# Altium PCB PCB1.PcbDoc
Units mm, origin at the board's own origin, x right, y up, seen from the top; angles counter-clockwise.
Board outline 96.77 x 92.46 mm, 2 copper layers (Top Layer, Bottom Layer); 31 components, 25 nets, 127 pads, 0 vias.
Unrouted connection lines stored in the file: 1.
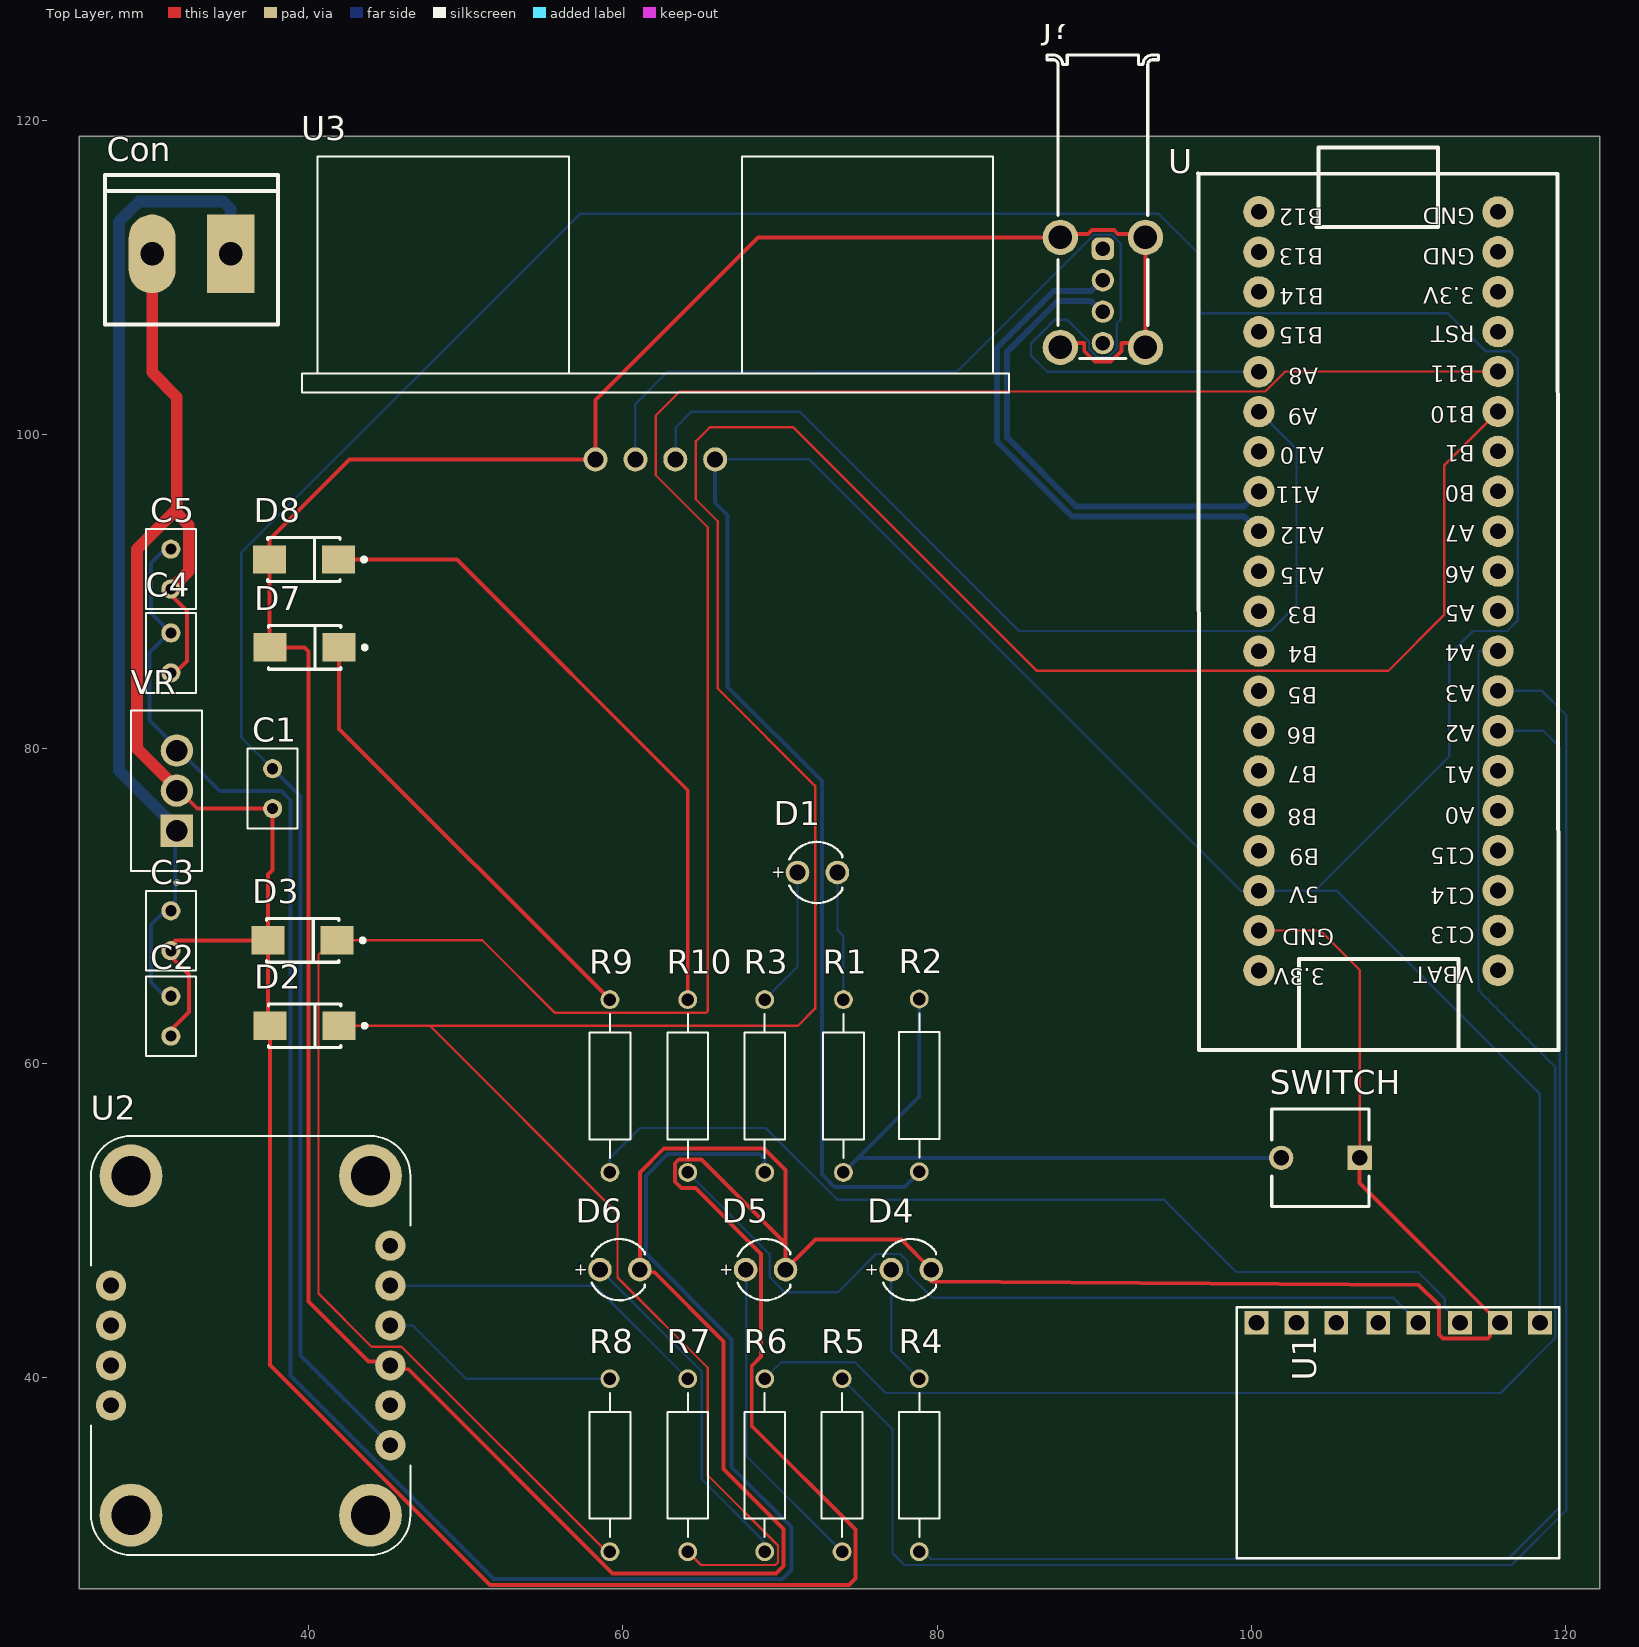
[diagram p0: Top Layer view]
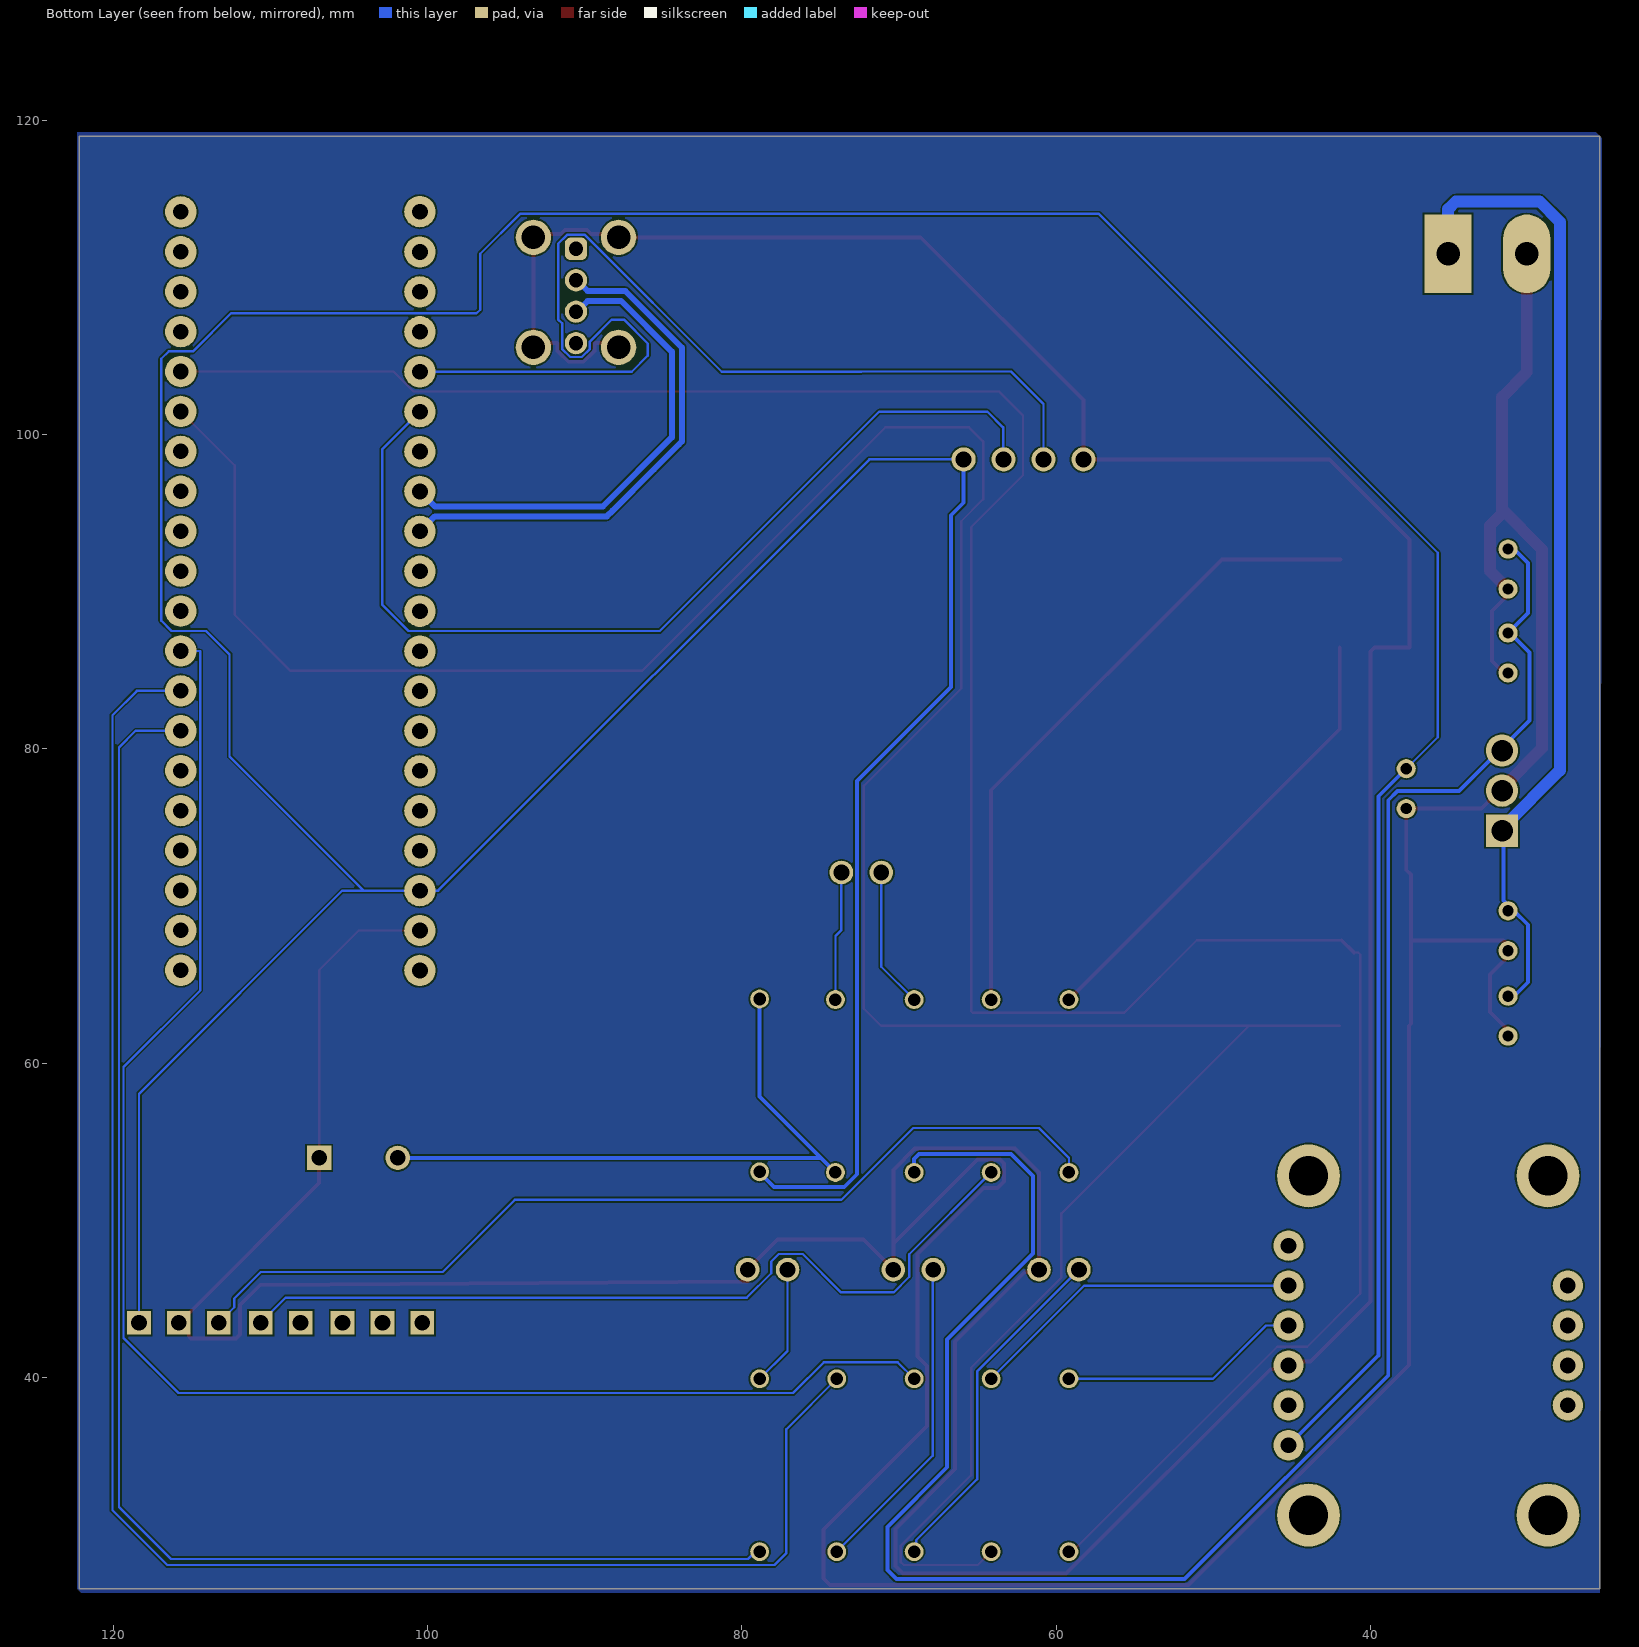
[diagram p1: Bottom Layer view, seen from below]
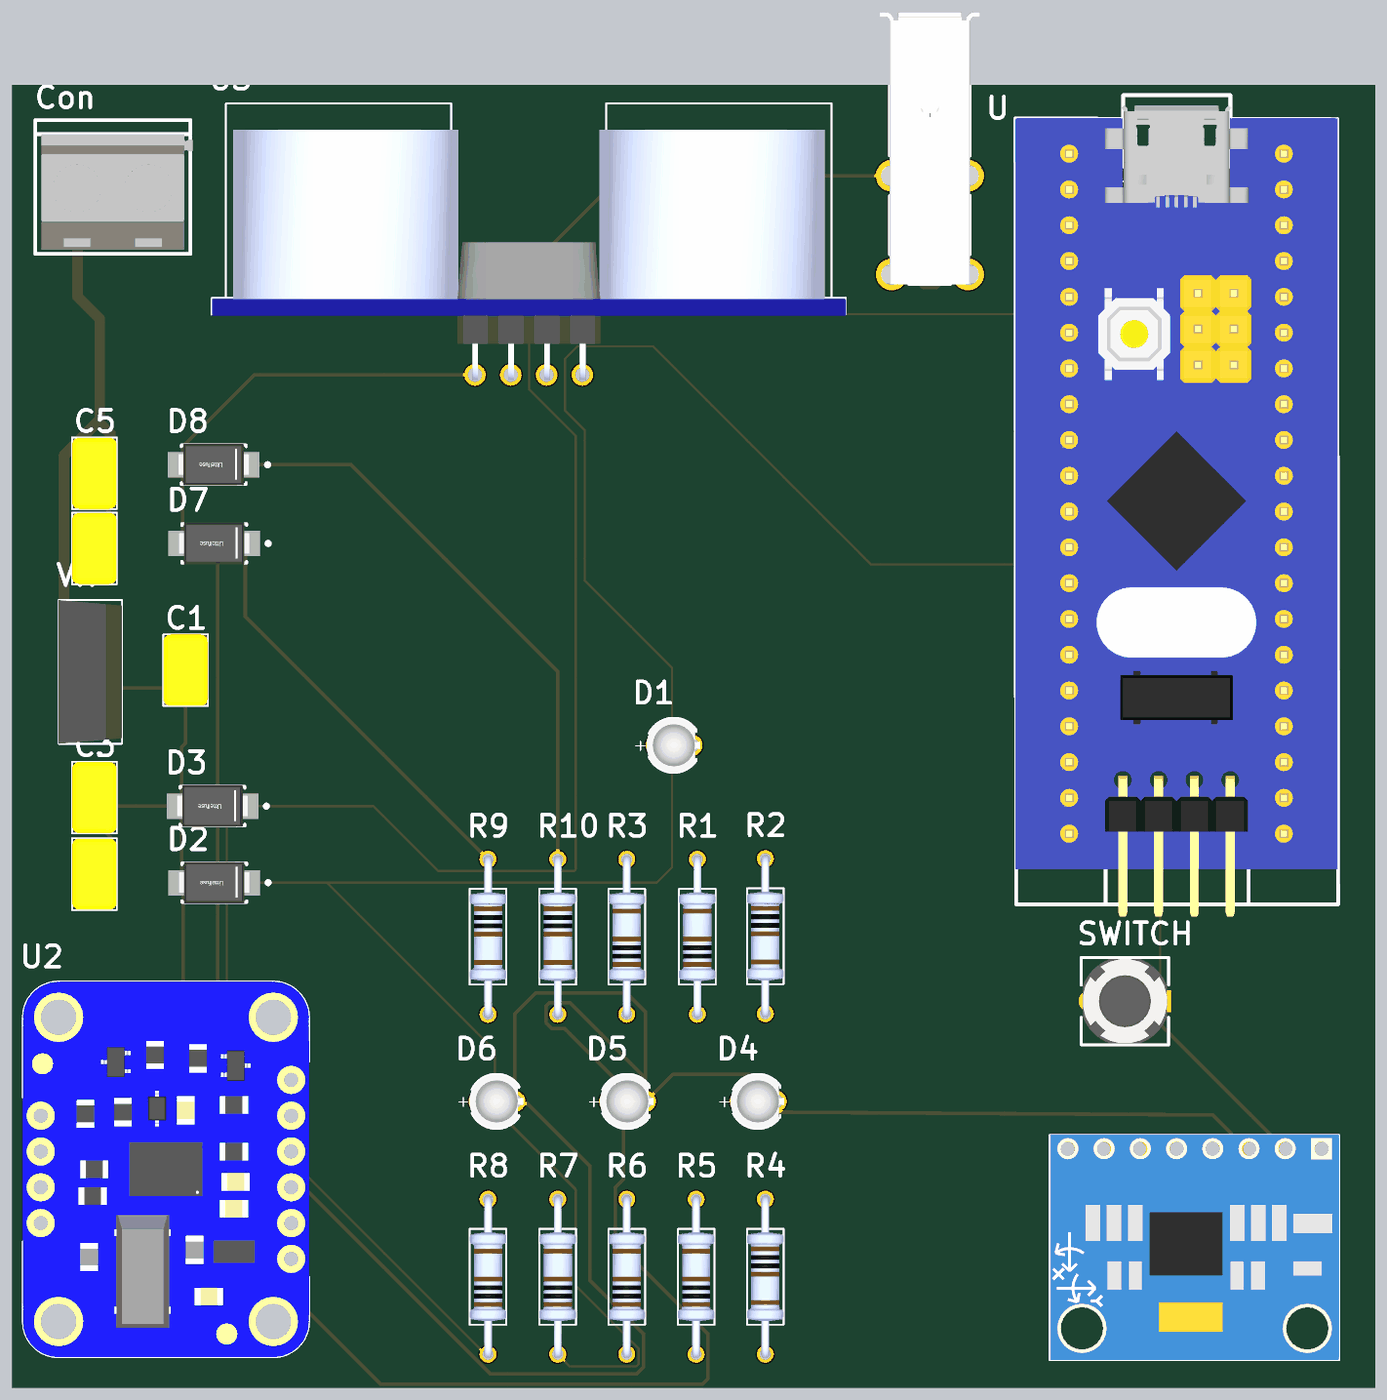
[diagram p2: 3D render of the assembled board from above, using the file's embedded part models]

## Layer stack, top to bottom
Top Solder: solder mask 0.0102, Solder Resist, Dk 3.5
Top Layer: signal copper 0.0356
Dielectric 1: dielectric 0.32, FR-4, Dk 4.8
Bottom Layer: signal copper 0.0356
Bottom Solder: solder mask 0.0102, Solder Resist, Dk 3.5

## Board outline
25.4,26.543 122.174,26.543 122.174,118.999 25.4,118.999

## Design rules (kind name [scope] priority, off if disabled: settings)
Clearance [All] p1: gap=0.1 ignorepadtopadclearanceinfootprint=FALSE
DiffPairsRouting DiffPairsRouting_1 [InDifferentialPair ('USB_2.0')] p1: maxlimit=0.254 minlimit=0.254 mostfreqgap=0.254 toplayer_minwidth=0.381 toplayer_maxwidth=0.381 toplayer_prefwidth=0.381 bottomlayer_minwidth=0.381 bottomlayer_maxwidth=0.381 bottomlayer_prefwidth=0.381 maxuncoupledlength=12.7
DiffPairsRouting [All] p2: maxlimit=0.254 minlimit=0.2 mostfreqgap=0.25 toplayer_minwidth=0.2 toplayer_maxwidth=0.35 toplayer_prefwidth=0.2 bottomlayer_minwidth=0.2 bottomlayer_maxwidth=0.35 bottomlayer_prefwidth=0.2 maxuncoupledlength=12.7
MatchedLengths [InDifferentialPair ('USB_2.0')] p1: tolerance=25.4 checknetsindiffpair=FALSE checkdiffpairvsdiffpair=TRUE checkxsignals=TRUE checkothers=TRUE
PolygonConnect [All] p1: connectstyle=Relief reliefconductorwidth=0.254 reliefentries=4 polygonreliefangle="90 Angle" airgapwidth=0.254
RoutingLayers [All] p1: top layer_v5=TRUE bottom layer_v5=FALSE
RoutingVias [All] p1: holewidth=0.711 width=1.27 viastyle="Through Hole" minholewidth=0.711 minwidth=1.27 maxholewidth=0.711 maxwidth=1.27
SolderMaskExpansion [All] p1: expansion=0.102 istentingtop=FALSE
SupplyNets "Schematic Supply Nets_2" [InNet('+12')] p1: voltage=0.000
SupplyNets "Schematic Supply Nets_1" [InNet('GND')] p2: voltage=0.000
UnRoutedNet [All] p1: checkbadconnections=TRUE
Width [All] p1: maxlimit=0.75 minlimit=0.15 preferedwidth=0.15
27 further rules are at their usual default settings.

## Classes and differential pairs
differential pair USB_2.0: +USB-D+ -USB-D-

## Components (designator, comment, footprint, x,y, rotation, side; value= is the part's Value field where it differs from the comment)
C1 "1uF" CAPRR254W50L508T317H508 37.719,77.47 r90 top
C2 "1uF" CAPRR254W50L508T317H508 31.242,62.992 r90 top
C3 "100nF" CAPRR254W50L508T317H508 31.242,68.427 r90 top
C4 "100nF" CAPRR254W50L508T317H508 31.242,86.106 r90 top
C5 "1uF" CAPRR254W50L508T317H508 31.242,91.44 r90 top
Con "Terminal" "Terminal Block 2 Pin" 34.552,99.006 r0 top
D1 "Blue, 2.8V, 30°" WL-TMRW_D3.9H10.5 72.39,72.136 r0 top
D2 "SMAJ6.0A" FP-SMAJ-MFG 39.751,62.383 r180 top
D3 "SMAJ6.0A" FP-SMAJ-MFG 39.624,67.818 r180 top
D4 "Blue, 2.8V, 30°" WL-TMRW_D3.9H10.5 78.359,46.863 r0 top
D5 "Blue, 2.8V, 30°" WL-TMRW_D3.9H10.5 69.088,46.863 r0 top
D6 "Blue, 2.8V, 30°" WL-TMRW_D3.9H10.5 59.817,46.863 r0 top
D7 "SMAJ6.0A" FP-SMAJ-MFG 39.751,86.461 r180 top
D8 "SMAJ6.0A" FP-SMAJ-MFG 39.71,92.049 r180 top
J? "614004134726" 614004134726 90.551,114.503 r180 top
R1 "1K" RESAD1100W55L680D260 74.041,58.547 r90 top
R2 "1K" RESAD1100W55L680D260 78.867,58.586 r270 top
R3 "330" RESAD1100W55L680D260 69.032,58.547 r90 top
R4 "1K" RESAD1100W55L680D260 78.867,34.417 r270 top
R5 "1K" RESAD1100W55L680D260 73.956,34.417 r90 top
R6 "1K" RESAD1100W55L680D260 69.032,34.417 r90 top
R7 "1K" RESAD1100W55L680D260 64.135,34.417 r90 top
R8 "1K" RESAD1100W55L680D260 59.182,34.417 r90 top
R9 "1K" RESAD1100W55L680D260 59.182,58.547 r270 top
R10 "1K" RESAD1100W55L680D260 64.135,58.547 r270 top
SWITCH "EVQ-11L07K" FP-EVQ-11L07K-MFG 104.394,53.975 r180 top
U "STM32F103C8T6" "Stm32 BluePill" 108.311,84.279 r180 top
U1 "MPU-6050" SEN0142 108.583,42.219 r180 top
U2 "2472" MODULE_2472 36.322,42.037 r90 top
U3 "HC-SR04" XCVR_HC-SR04 62.072,98.425 r180 top
VR "L7805" TO255P1020X450X2000-3 30.961,77.343 r90 top

## Footprints (in the part's own frame and the unit in brackets; to place one, negate y for a bottom-side part, rotate by r counter-clockwise, add the part's x,y. Pads: shape width x height; smd on the part's side, far side on the other; paste and mask are expansions set on the pad)
614004134726 [mm] "USB 2.0 Type A Up Right"
  rrect50% 1.42x1.42 hole 0.92: 1(0,2.68)
  round 1.42 hole 0.92: 2(0,4.68) 3(0,6.68) 4(0,8.68)
  round 2.25 hole 1.5: Shell(-2.71,8.95) Shell(-2.71,1.95) Shell(2.71,8.95) Shell(2.71,1.95)
  silkscreen extent -3.55,-9.65 3.55,9.65, body extent -3.55,-9.65 3.55,9.65, height 14.49
CAPRR254W50L508T317H508 [mm]
  round 1.218 hole 0.71: 1(-1.27,0) 2(1.27,0)
  silkscreen extent -2.54,-1.59 2.54,1.59, body extent -2.54,-1.59 2.54,1.59, height 5.08
FP-EVQ-11L07K-MFG [mm]
  rect 1.55x1.55 hole 1 paste-2539.97 mask+0: A(-2.5,0)
  round 1.55 hole 1 paste-2539.97 mask+0: B(2.5,0)
  silkscreen extent -3.1,-3.1 3.1,3.1, body extent -3.37,-3.2 3.37,3.2, height 0.25
FP-SMAJ-MFG [mm]
  rect 2.1x1.8 smd paste+0 mask+0: 1(-2.2,0) 2(2.2,0)
  silkscreen extent -3.95,-1.39 2.3,1.4, body extent -3.35,-1.5 3.35,1.5, height 0.25
MODULE_2472 [mm]
  round 1.93 hole 1: 1(-6.35,-8.89) 2(-3.81,-8.89) 3(-1.27,-8.89) 4(1.27,-8.89) 5(3.81,-8.89) 6(6.35,-8.89) 7(3.81,8.89) 8(1.27,8.89) 9(-1.27,8.89) 10(-3.81,8.89)
  round 4 hole 2.5: SH1(-10.795,-7.62) SH2(10.795,-7.62) SH3(10.795,7.62) SH4(-10.795,7.62)
  silkscreen extent -13.33,-10.16 13.33,10.16, body extent -13.33,-10.16 13.33,10.16, height 4.23
RESAD1100W55L680D260 [mm]
  round 1.2 hole 0.8: 1(-5.5,0) 2(5.5,0)
  silkscreen extent -4.58,-1.3 4.58,1.3, body extent -5.77,-1.3 5.77,1.3, height 2.6
SEN0142 [mm]
  rect 1.508x1.508 / inner round 1.508 / far side rect 1.508x1.508 hole 1: 1(-9.779,-1.27) 2(-7.239,-1.27) 3(-4.699,-1.27) 4(-2.032,-1.27) 5(0.508,-1.27) 6(3.175,-1.27) 7(5.715,-1.27) 8(8.255,-1.27)
  silkscreen extent -11,-2.25 9.53,13.72, body extent -11.01,-2.29 9.49,13.71, height 2.5
"Stm32 BluePill" [mm]
  round 2 hole 1: 1(7.828,-29.908) 2(7.828,-27.343) 3(7.828,-24.803) 4(7.828,-22.263) 5(7.828,-19.723) 6(7.828,-17.183) 7(7.828,-14.643) 8(7.828,-12.103) 9(7.828,-9.563) 10(7.828,-7.023) 11(7.828,-4.483) 12(7.828,-1.943) 13(7.828,0.597) 14(7.828,3.137) 15(7.828,5.677) 16(7.828,8.217) 17(7.828,10.757) 18(7.828,13.297) 19(7.828,15.837) 20(7.828,18.377) 21(-7.386,18.366) 22(-7.386,15.826) 23(-7.386,13.286) 24(-7.386,10.746) 25(-7.386,8.206) 26(-7.386,5.666) 27(-7.386,3.126) 28(-7.386,0.586) 29(-7.386,-1.954) 30(-7.386,-4.494) 31(-7.386,-7.034) 32(-7.386,-9.574) 33(-7.386,-12.114) 34(-7.386,-14.654) 35(-7.386,-17.194) 36(-7.386,-19.734) 37(-7.386,-22.274) 38(-7.386,-24.814) 39(-7.386,-27.354) 40(-7.386,-29.894)
  silkscreen extent -11.22,-34 11.69,23.43, body extent -11.18,-33.27 11.68,24.29, height 12.31
"Terminal Block 2 Pin" [mm]
  rect 3x5 hole 1.5: 1(0.5,12.5)
  oval 3x5 hole 1.5: 2(-4.5,12.5)
  silkscreen extent -7.5,8 3.5,17.5, body extent -7.08,8.3 3.68,16.5, height 10.25
TO255P1020X450X2000-3 [mm]
  rect 2.055x2.055 / inner round 2.055 / far side rect 2.055x2.055 hole 1.37: 1(-2.55,-0.662)
  round 2.055 hole 1.37: 2(0,-0.662) 3(2.55,-0.662)
  silkscreen extent -5.95,-2.25 5.1,2.25, body extent -5.1,-2.25 5.1,2.25, height 20
WL-TMRW_D3.9H10.5 [mm] "THT Mono-color Round LED, 2-leads"
  round 1.5 hole 1: 1(1.27,0) 2(-1.27,0)
  silkscreen extent -1.79,-1.95 1.57,1.95, body extent -1.97,-1.95 1.85,1.95, height 10.55
XCVR_HC-SR04 [mm]
  round 1.53 hole 1.02: 1(-3.81,0) 2(-1.27,0) 3(1.27,0) 4(3.81,0)
  silkscreen extent -22.5,-19.27 22.5,-4.27, body extent -22.52,-17.4 22.48,0.4, height 20

## Part data
C1 C2 C3 C4 C5: library part SR201C104KARTR, "SR 100nF Ceramic Multilayer Cap,100V dc,+125C,X7R Dielectric,+/-10%,Through Hole", Package=None, Check_prices=https://www.snapeda.com/parts/SR201C104KARTR/Kyocera/view-part/?ref=eda, MF="KYOCERA AVX", MP=SR201C104KARTR, SnapEDA_Link=https://www.snapeda.com/parts/SR201C104KARTR/Kyocera/view-part/?ref=snap
Con: library part "Terminal Block 2", "Connector blue screw"
D1 D4 D5 D6: library part 151033BS03000, "WL-TMRW Mono-color Round Waterclear, THT, D3.9 x H10.5mm, Blue, 2.8V, 30°", Emitting Color=Blue, Forward Voltage=2.8V, Manufacturer="Wurth Elektronik", Operating Temperature Max=85°C, Operating Temperature Min=-40°C, Category="Signal LEDs", Chip Technology=InGaN, ComponentLink1Description="Website Link", ComponentLink1URL=https://www.we-online.com/redexpert/article/151033BS03000?ad, ComponentLink2Description="Datasheet Link", ComponentLink2URL=https://www.we-online.com/redexpert/spec/151033BS03000?ad, Diameter=3.9mm, Dominant Wavelength=470nm, Height=10.5mm, Luminous Intensity=3800mcd, Manufacturer Part Number=151033BS03000, Match Code=WL-TMRW, Mount="Through Hole", Packaging=Bulk, Peak Wavelength=465nm, Viewing Angle=30°
D2 D3 D7 D8: library part CMP-08607-000083-1, "TVS DIODE 6V 10.3V DO214AC", Breakdown Voltage=6.67V, Clamping Voltage=10.3V, Manufacturer=Littelfuse, Max Junction Temp=+150°C, Package=SMAJ, Peak Pulse Current=38.8A, Peak Pulse Power=400W, Reverse Standoff Voltage=6V, Temperature="-65°C to +150°C", Temperature Range Low=-65°C, Automotive=No, Category=Diode, ComponentLink2Description=Datasheet, ComponentLink2URL=https://www.littelfuse.com/~/media/electronics/datasheets/tvs_diodes/littelfuse_tvs_diode_smaj_datasheet.pdf.pdf, Device Class L1="Circuit Protection", Device Class L2="TVS Diodes", Device Class L3=unset, Digikey Description="TVS DIODE 6V 10.3V DO214AC", Direction=Unidirectional, Height=2.29mm, Lead Free=Yes, Manufacturer Part Number=SMAJ6.0A, Mouser Description="TVS Diodes - Transient Voltage Suppressors 60Vr 400W 4.1A 5% UniDirectional", Number Of Channels=1, Octopart=https://octopart.com/smaj6.0a-littelfuse-350212, RoHS=TRUE, Temperature Range High=+150°C
J?: "WR-COM USB 2.0 Type A Up Right", Manufacturer="Wurth Elektronik", Operating Temperature Max=105°C, Operating Temperature Min=-40°C, Rated Current=1.5A, Working Voltage="30V (AC)", Application="USB 2.0", Category="Input/Output Connectors", ComponentLink1Description="Website Link", ComponentLink1URL=https://www.we-online.com/redexpert/article/614004134726?ad, ComponentLink2Description="Datasheet Link", ComponentLink2URL=https://www.we-online.com/redexpert/spec/614004134726?ad, Gender=Receptacle, Interface Type="Type A", Manufacturer Part Number=614004134726, Match Code=WR-USB, Mount="Through Hole", Number of Pins=4, Number of Ports=1, Orientation="Up Right", Packaging=Tray
R1 R2 R3 R4 R5 R6 R7 R8 R9 R10: library part MFR-25FBF52-1K, "1.07 kOhms Â±1% 0.25W, 1/4W Through Hole Resistor Axial - Metal Film", Package="Axial Yageo", Availability="In Stock", Check_prices=https://www.snapeda.com/parts/MFR-25FBF52-1K/Yageo/view-part/?ref=eda, MF=Yageo, MP=MFR-25FBF52-1K, Price=None, Purchase-URL=https://pricing.snapeda.com/search/part/MFR-25FBF52-1K/?ref=eda, SnapEDA_Link=https://www.snapeda.com/parts/MFR-25FBF52-1K/Yageo/view-part/?ref=snap
SWITCH: library part CMP-00287-55397191-1, "EVQ-11L07K Switch Tactile N.O. SPST Round Button PC Pins 0.02A 15VDC 1.6N Thru-Hole Radial T/R", Case/Package=Radial, Contact Current Rating=20mA, Contact Resistance=50mΩ, Max Operating Temperature=70°C, Max Voltage Rating (DC)=15V, Min Operating Temperature=-20°C, Operating Force=1.6N, Actuator Length=3.1mm, Current Rating=20mA, Electrical Life=100kcycles, Height=3.9mm, Illumination Type="Illuminated, Non-Illuminated", Lead Free="Lead Free", Length=6mm, Life (Cycles)=100kcycles, Mechanical Life=100kcycles, Mount="Through Hole", NexarPartId=55397191, Number of Pins=2, Number of Positions=2, Orientation=Straight, Radiation Hardening=No, REACH SVHC=Unknown, RoHS=Compliant, Switch Function=Off-Mom, Switch Travel=250µm, Termination="PC Pin", Throw Configuration=SPST, Voltage Rating (DC)=15V, Width=6mm
U: library part BluePill, "Designed By @Alixahedi"
U1: library part SEN0142, "MPU-6050 series Accelerometer, Gyroscope, 3 Axis Sensor Evaluation Board", Package=None, Check_prices=https://www.snapeda.com/parts/SEN0142/DFRobot/view-part/?ref=eda, MF=DFRobot, MP=SEN0142, SnapEDA_Link=https://www.snapeda.com/parts/SEN0142/DFRobot/view-part/?ref=snap
U2: "Adafruit 9-DOF Absolute Orientation IMU Fusion Breakout - BNO055", Package="Non-Standard Adafruit", Check_prices=https://www.snapeda.com/parts/2472/Adafruit+Industries/view-part/?ref=eda, MF=Adafruit, MP=2472, SnapEDA_Link=https://www.snapeda.com/parts/2472/Adafruit+Industries/view-part/?ref=snap
U3: "Ultrasonic Sensor Module", Package=None, Availability=Unavailable, MP=HC-SR04, Price=None
VR: "Standard Regulator Pos 5V 1.5A 3-Pin(3+Tab) TO-220FP Tube", Package=None, Availability="Not in stock", Check_prices=https://www.snapeda.com/parts/L7805/STMicroelectronics/view-part/?ref=eda, MF=STMicroelectronics, MP=L7805, Price=None, SnapEDA_Link=https://www.snapeda.com/parts/L7805/STMicroelectronics/view-part/?ref=snap

## Nets (pads, with @x,y where several pads share a name; then routed paths per layer and width w, separated by ;. In a path a pad name is that pad's centre, name@x,y a point inside that pad or via, vN(x,y) a via of type N, cw(c..) or ccw(c..) an arc to the next point about the centre after c; other vN are vias at no path point)
+12: C2.2 C3.2 Con.1 VR.1 | length 62.5
  Bottom Layer w0.25: C2.2@30.861,64.262 29.972,65.151 29.972,68.808 30.861,69.697 31.523,70.36 VR.1@31.523,75.047
  Bottom Layer w0.75: VR.1@31.523,75.047 27.94,78.63 27.94,113.538 29.235,114.833 34.569,114.833 35.052,114.351 Con.1
echo: U3.3 U.5 | length 69.6
  Top Layer w0.15: U.5 100.722,104.002 U.5@100.838,103.886
  Bottom Layer w0.15: U3.3 60.802,101.95 62.865,104.013 72.379,104.013 ; 72.379,104.002 81.271,104.002 89.976,112.708 91.126,112.708 91.686,112.148 91.686,107.334 91.436,107.084 91.436,105.456 90.918,104.938 90.184,104.938 89.666,105.456 89.666,105.92 88.271,107.315 87.503,107.315 85.979,105.791 85.979,105.029 87.006,104.002 U.5
GND: C1.1 C2.1 C3.1 C4.1 C5.1 Con.2 D2.2 D3.2 D4.1 D5.1 D6.1 D7.2 D8.2 J?.4 J?.Shell SWITCH.A U1.2 U2.3 U3.4 U.19 VR.2 | length 489.1
  Top Layer w0.15: U.19 104.379,68.442 106.894,65.928 SWITCH.A
  Top Layer w0.25: C2.1@30.861,61.722 32.385,63.246 32.385,65.633 30.861,67.157 31.522,67.818 D3.2 ; C5.1@31.051,89.98 32.258,88.773 32.258,85.598 C4.1@31.242,84.582 ; VR.2@31.523,77.597 32.92,76.2 C1.1 37.719,72.304 37.424,72.009 D3.2 ; J?.Shell@87.841,105.553 88.111,105.823 89.339,105.823 89.366,105.796 89.366,105.332 90.06,104.638 91.042,104.638 91.736,105.332 91.736,105.796 91.763,105.823 92.991,105.823 93.261,105.553 93.261,112.553 93.056,112.758 91.5,112.758 91.25,113.008 89.852,113.008 89.602,112.758 87.841,112.758 87.841,112.553 68.611,112.553 58.262,102.204 U3.4 42.611,98.425 37.51,93.324 D8.2 37.51,86.461 D7.2 39.751,86.461 40.005,86.207 40.005,44.831 43.816,41.02 44.959,41.02 U2.3 45.455,40.524 46.364,40.524 59.36,27.528 69.743,27.528 70.231,28.016 70.231,30.353 66.421,34.163 66.421,42.291 62.013,46.699 61.251,46.699 D6.1 61.087,53.049 62.61,54.572 68.999,54.572 70.358,53.213 70.358,48.514 ; SWITCH.A 106.894,52.364 115.14,44.118 115.193,44.118 U1.2 115.193,42.86 115.193,42.641 115.047,42.494 112.192,42.494 111.938,42.748 111.938,44.602 110.642,45.898 79.629,46.101 D4.1 77.724,48.768 72.263,48.768 D5.1 70.358,48.514 ; D3.2 37.424,62.51 D2.2 37.551,40.808 51.562,26.797 74.397,26.797 74.803,27.203 74.803,30.328 68.207,36.924 68.207,40.742 68.809,41.344 68.809,47.854 64.618,52.045 63.729,52.045 63.31,52.463 63.31,53.619 63.563,53.872 65,53.872 70.358,48.514
  Top Layer w0.75: Con.2 30.052,103.962 31.623,102.391 31.623,95.25 ; C5.1 32.385,91.313 32.385,94.234 31.623,94.996 31.623,95.25 ; VR.2@31.523,77.597 29.083,80.037 29.083,92.71 31.623,95.25
NetC4_2: C4.2 C5.2 R3.1 VR.3 | length 135.2
  Bottom Layer w0.25: C4.2@30.861,87.122 29.87,86.131 29.87,81.8 34.353,77.318 38.278,77.318 38.862,76.733 38.862,40.132 51.816,27.178 70.155,27.178 70.739,27.762 70.739,30.48 66.929,34.29 66.929,42.418 61.468,47.879 61.468,52.832 62.858,54.222 68.714,54.222 69.032,53.904 R3.1 ; C5.2@30.861,92.71 29.972,91.821 29.972,88.646 C4.2
NetD1_2: D1.2 R3.2 | length 9
  Bottom Layer w0.15: R3.2 71.12,66.135 D1.2
NetD4_2: D4.2 R4.1 | length 7.7
  Bottom Layer w0.15: D4.2 77.089,41.695 R4.1
NetD5_2: D5.2 R5.1 | length 20.5
  Top Layer w0.25: D5.2 D5.2@67.857,46.824
  Bottom Layer w0.15: D5.2@67.857,46.824 67.857,35.017 R5.1
NetD6_2: D6.2 R6.1 | length 22.3
  Top Layer w0.15: R6.1@68.9,29.049 R6.1
  Bottom Layer w0.15: D6.2 65.024,40.386 65.024,33.528 68.9,29.652 R6.1@68.9,29.049
NetR1_1: R1.1 R2.1 SWITCH.B | length 39.8
  Bottom Layer w0.25: R1.1 74.969,53.975 ; R2.1@78.867,64.047 78.867,57.873 74.969,53.975 ; SWITCH.B@101.727,53.975 74.969,53.975
NetR7_2: R7.2 U2.5 | length 21.4
  Bottom Layer w0.15: U2.5 58.205,45.847 R7.2
NetR8_2: R8.2 U2.4 | length 15.4
  Bottom Layer w0.15: U2.4 46.634,43.307 50.024,39.917 R8.2
NetR9_2: R9.2 U1.3 | length 61.3
  Bottom Layer w0.15: R9.2 59.182,53.975 61.087,55.88 69.088,55.88 73.66,51.308 94.437,51.308 99.035,46.711 110.617,46.711 112.299,45.029 112.299,44.473 U1.3
NetR10_2: R10.2 U1.4 | length 53.7
  Bottom Layer w0.15: R10.2 69.342,47.84 69.342,46.406 70.333,45.415 73.685,45.415 76.124,47.854 77.648,47.854 78.13,47.371 78.13,46.634 79.68,45.085 109.019,45.085 U1.4
PA2: R4.2 U.27 | length 95
  Top Layer w0.15: R4.2 R4.2@79.138,28.917
  Bottom Layer w0.15: R4.2@79.138,28.917 79.607,28.448 116.332,28.448 119.634,31.75 119.634,80.093 118.574,81.153 U.27
PA3: R5.2 U.28 | length 112.6
  Bottom Layer w0.15: R5.2 77.165,36.708 77.165,28.829 77.927,28.067 116.56,28.067 120.041,31.549 120.041,82.143 118.491,83.693 U.28
PA4: R6.2 U.29 | length 100
  Bottom Layer w0.15: R6.2 70.085,40.97 74.778,40.97 76.733,39.014 115.845,39.014 119.341,42.51 119.341,59.754 114.452,64.643 114.452,86.208 U.29
PB8: D7.1 R9.1 | length 29.6
  Top Layer w0.25: D7.1 41.951,81.278 R9.1
PB9: D8.1 R10.1 | length 41.6
  Top Layer w0.25: D8.1 49.454,92.049 64.135,77.368 R10.1
SCL: D2.1 R7.1 U.35 | length 189.7
  Top Layer w0.15: D2.1 47.726,62.383 ; R7.1 64.985,28.067 69.698,28.067 69.875,28.245 69.875,29.312 65.405,33.782 65.405,40.615 59.665,46.355 59.665,50.444 47.726,62.383 ; U.35 112.268,98.044 112.268,88.519 108.712,84.963 102.501,84.963 86.36,84.963 70.866,100.457 65.532,100.457 64.643,99.568 64.643,95.885 66.04,94.488 66.04,83.845 72.238,77.648 72.238,63.475 71.145,62.383 47.726,62.383
SDA: D3.1 R8.1 U.36 | length 168.2
  Top Layer w0.15: D3.1@41.049,67.043 40.786,67.043 40.64,66.897 40.64,45.339 44.018,41.961 45.923,41.961 58.967,28.917 R8.1 ; D3.1 51.054,67.818 55.651,63.221 65.317,63.221 65.405,63.308 65.405,94.107 62.103,97.409 62.103,101.219 63.627,102.743 100.885,102.743 102.155,104.013 U.36
  Top Layer w0.25: D3.1@41.049,67.043 D3.1
  Bottom Layer w0.25: U.36 U.36@115.824,103.886
trig: U3.2 U.6 | length 61.7
  Top Layer w0.15: U3.2 U3.2@63.373,98.456
  Bottom Layer w0.15: U3.2@63.373,98.456 63.373,100.457 64.378,101.462 71.258,101.462 85.217,87.503 101.219,87.503 102.87,89.154 102.87,99.075 U.6
USB-D+: J?.3 U.8 | length 31.4
  Top Layer w0.381: J?.3@90.491,107.823 J?.3 ; U.8@100.481,96.382 U.8
  Bottom Layer w0.381: 88.821,95.456 84.455,99.822 84.455,105.283 87.677,108.505 89.808,108.505 J?.3@90.491,107.823 ; 88.847,95.43 99.528,95.43 U.8@100.481,96.382
USB-D-: J?.2 U.9 | length 33.5
  Top Layer w0.381: J?.2@90.491,109.823 J?.2 ; U.9@100.481,93.842 U.9
  Bottom Layer w0.381: J?.2@90.491,109.823 89.808,109.14 87.414,109.14 83.82,105.546 83.82,99.559 84.006,99.373 85.589,97.79 88.212,95.167 88.584,94.795 88.847,94.795 99.528,94.795 U.9@100.481,93.842
VCC: C1.2 R2.2 U1.1 U2.1 U3.1 U.18 | length 336.2
  Bottom Layer w0.15: C1.2 35.712,80.747 35.712,92.481 57.277,114.046 94.107,114.046 96.647,111.506 96.647,107.95 96.88,107.717 112.501,107.717 114.922,105.296 116.472,105.296 116.942,104.826 116.942,88.163 116.281,87.503 114.097,87.503 112.598,86.004 112.598,79.517 104.064,70.982 ; U3.1 71.882,98.425 99.325,70.982 U.18 104.064,70.982 ; U1.1 118.362,58.041 105.421,70.982 104.064,70.982
  Bottom Layer w0.25: C1.2 39.497,76.962 39.497,41.402 U2.1 ; U3.1 65.882,95.662 66.675,94.869 66.675,83.947 72.669,77.953 72.669,52.934 73.482,52.121 77.941,52.121 R2.2@78.867,53.047
VSB: D1.1 R1.2 | length 8.2
  Bottom Layer w0.15: D1.1 73.66,68.478 74.041,68.097 R1.2
pads on no net: J?.1 U1.5 U1.6 U1.7 U1.8 U2.2 U2.6 U2.7 U2.8 U2.9 U2.10 U2.SH1 U2.SH2 U2.SH3 U2.SH4 U.1 U.2 U.3 U.4 U.7 U.10 U.11 U.12 U.13 U.14 U.15 U.16 U.17 U.20 U.21 U.22 U.23 U.24 U.25 U.26 U.30 U.31 U.32 U.33 U.34 U.37 U.38 U.39 U.40

## Polygon pours and split planes (outlines as drawn)
no net on Bottom Layer "NONET_L02_P000" (solid, pour order 0): 25.273,118.872 25.654,119.253 122.301,119.253 122.301,26.543 122.047,26.289 25.4,26.289

## Text inside footprints (layer, text, board x,y; h text height)
D1: Top Overlay "+" at 69.44,71.786 h0.8
D4: Top Overlay "+" at 75.409,46.513 h0.8
D5: Top Overlay "+" at 66.138,46.513 h0.8
D6: Top Overlay "+" at 56.867,46.513 h0.8
U: Top Overlay "5V" at 104.318,71.585 h1.78 r180; Top Overlay "B9" at 104.318,73.998 h1.78 r180; Top Overlay "B8" at 104.191,76.538 h1.78 r180; Top Overlay "3.3V" at 104.699,66.378 h1.78 r180; Top Overlay "GND" at 105.263,68.892 h1.78 r180; Top Overlay "A5" at 114.224,89.492 h1.78 r180; Top Overlay "A2" at 114.224,81.841 h1.78 r180; Top Overlay "A3" at 114.224,84.386 h1.78 r180; Top Overlay "A4" at 114.224,86.971 h1.78 r180; Top Overlay "RST" at 114.224,107.272 h1.78 r180; Top Overlay "B10" at 114.224,102.141 h1.78 r180; Top Overlay "B11" at 114.224,104.726 h1.78 r180; Top Overlay "A6" at 114.224,91.981 h1.78 r180; Top Overlay "A7" at 114.224,94.566 h1.78 r180; Top Overlay "B0" at 114.224,97.112 h1.78 r180; Top Overlay "B1" at 114.224,99.671 h1.78 r180; Top Overlay "3.3V" at 114.224,109.735 h1.78 r180; Top Overlay "B15" at 104.562,107.17 h1.78 r180; Top Overlay "A8" at 104.254,104.605 h1.78 r180; Top Overlay "A11" at 104.338,97.03 h1.78 r180; Top Overlay "B3" at 104.191,89.39 h1.78 r180; Top Overlay "A9" at 104.224,102.039 h1.78 r180; Top Overlay "A15" at 104.625,91.879 h1.78 r180; Top Overlay "A12" at 104.625,94.464 h1.78 r180; Top Overlay "A10" at 104.625,99.55 h1.78 r180; Top Overlay "VBAT" at 114.151,66.499 h1.78 r180; Top Overlay "B5" at 104.191,84.285 h1.78 r180; Top Overlay "B14" at 104.592,109.654 h1.78 r180; Top Overlay "B7" at 104.191,79.25 h1.78 r180; Top Overlay "B4" at 104.224,86.87 h1.78 r180; Top Overlay "B6" at 104.16,81.719 h1.78 r180; Top Overlay "C15" at 114.224,74.074 h1.78 r180; Top Overlay "C13" at 114.224,69.019 h1.78 r180; Top Overlay "C14" at 114.224,71.508 h1.78 r180; Top Overlay "A0" at 114.224,76.639 h1.78 r180; Top Overlay "A1" at 114.153,79.199 h1.78 r180; Top Overlay "GND" at 114.224,112.225 h1.78 r180; Top Overlay "B13" at 104.572,112.225 h1.78 r180; Top Overlay "GND" at 114.224,114.79 h1.78 r180; Top Overlay "B12" at 104.562,114.734 h1.78 r180